# Altium PCB PCB1.PcbDoc
Units mm, origin at the board's own origin, x right, y up, seen from the top; angles counter-clockwise.
Board outline 46.86 x 54.61 mm, 2 copper layers (Top Layer, Bottom Layer); 14 components, 16 nets, 104 pads, 8 vias.
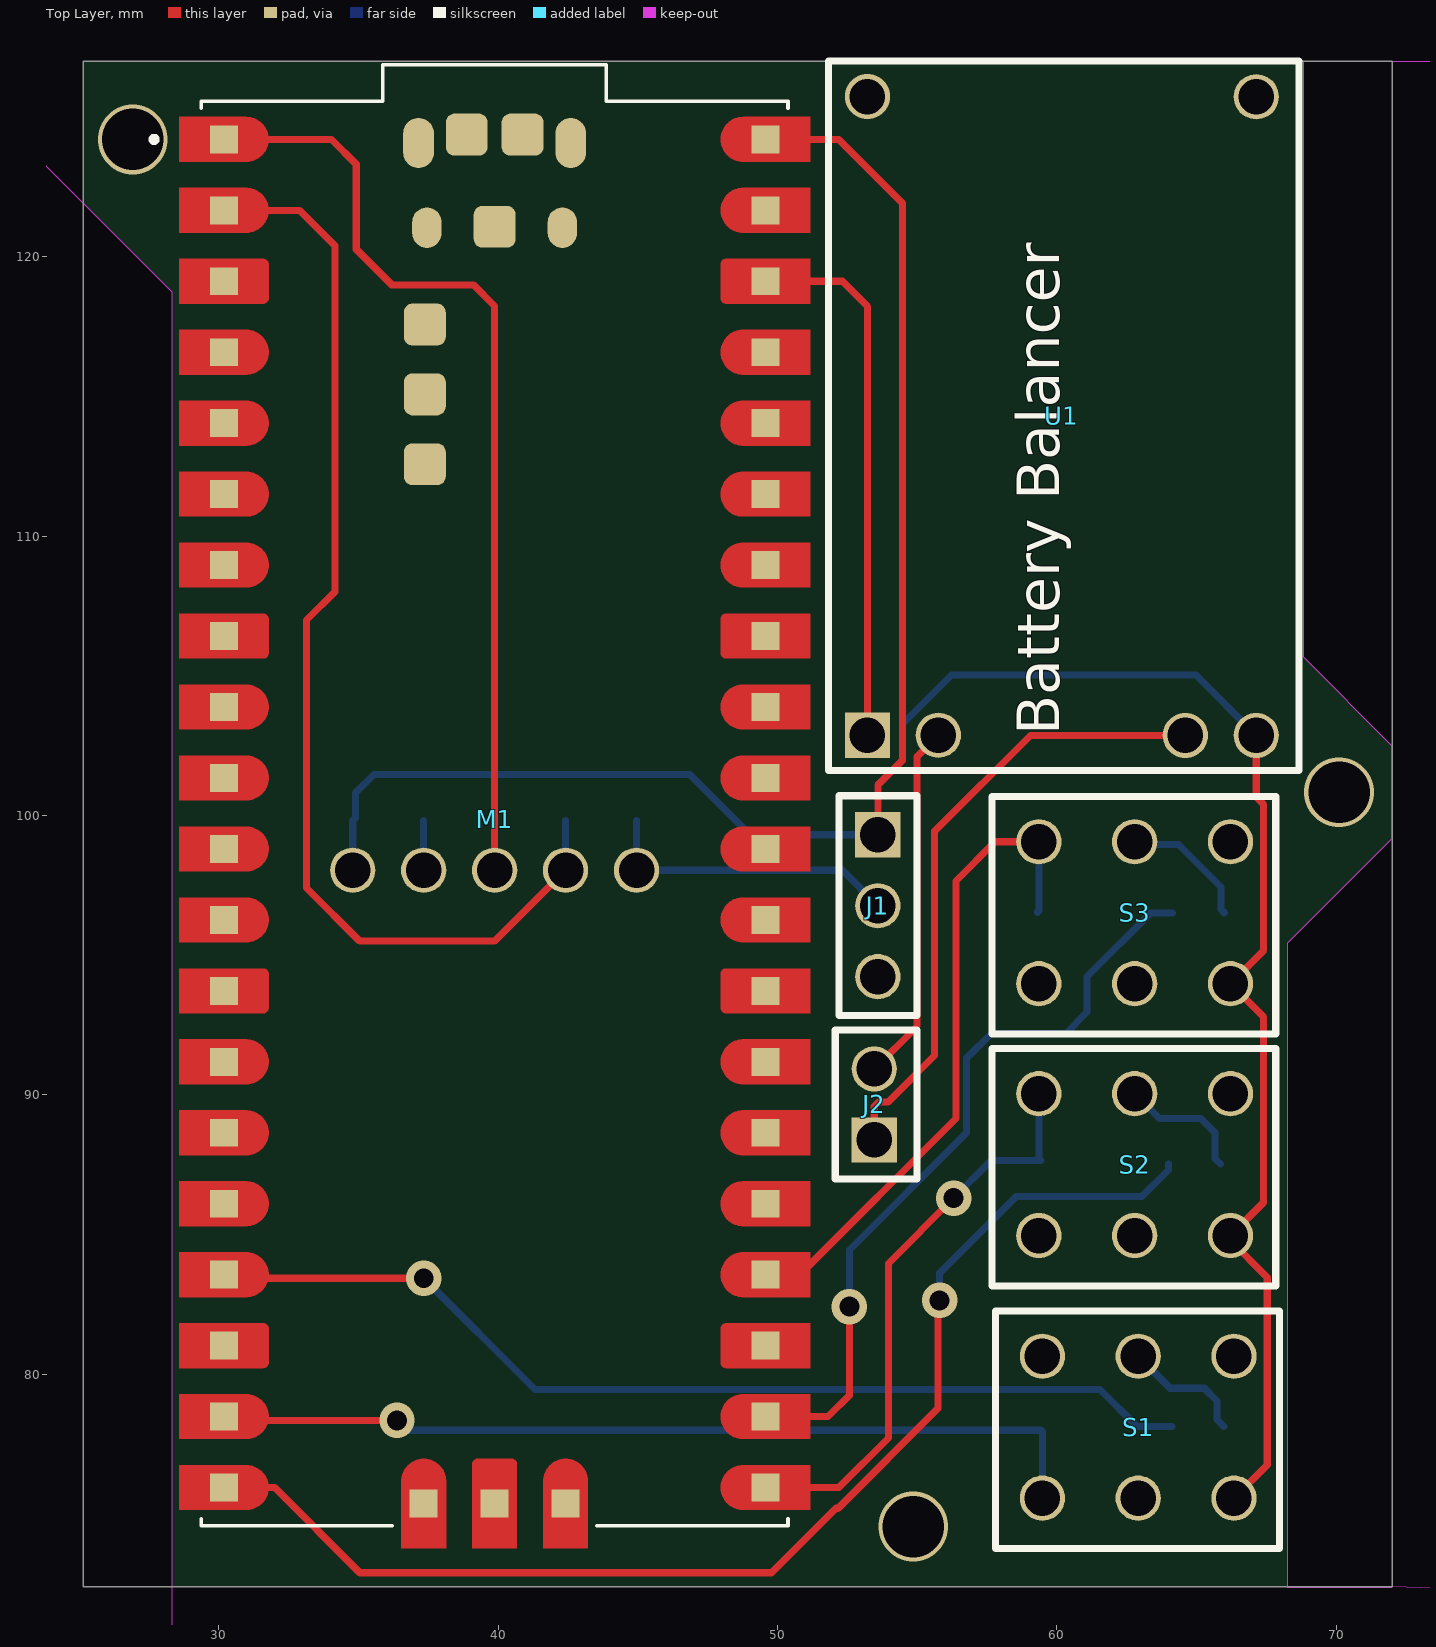
[diagram p0: Top Layer view]
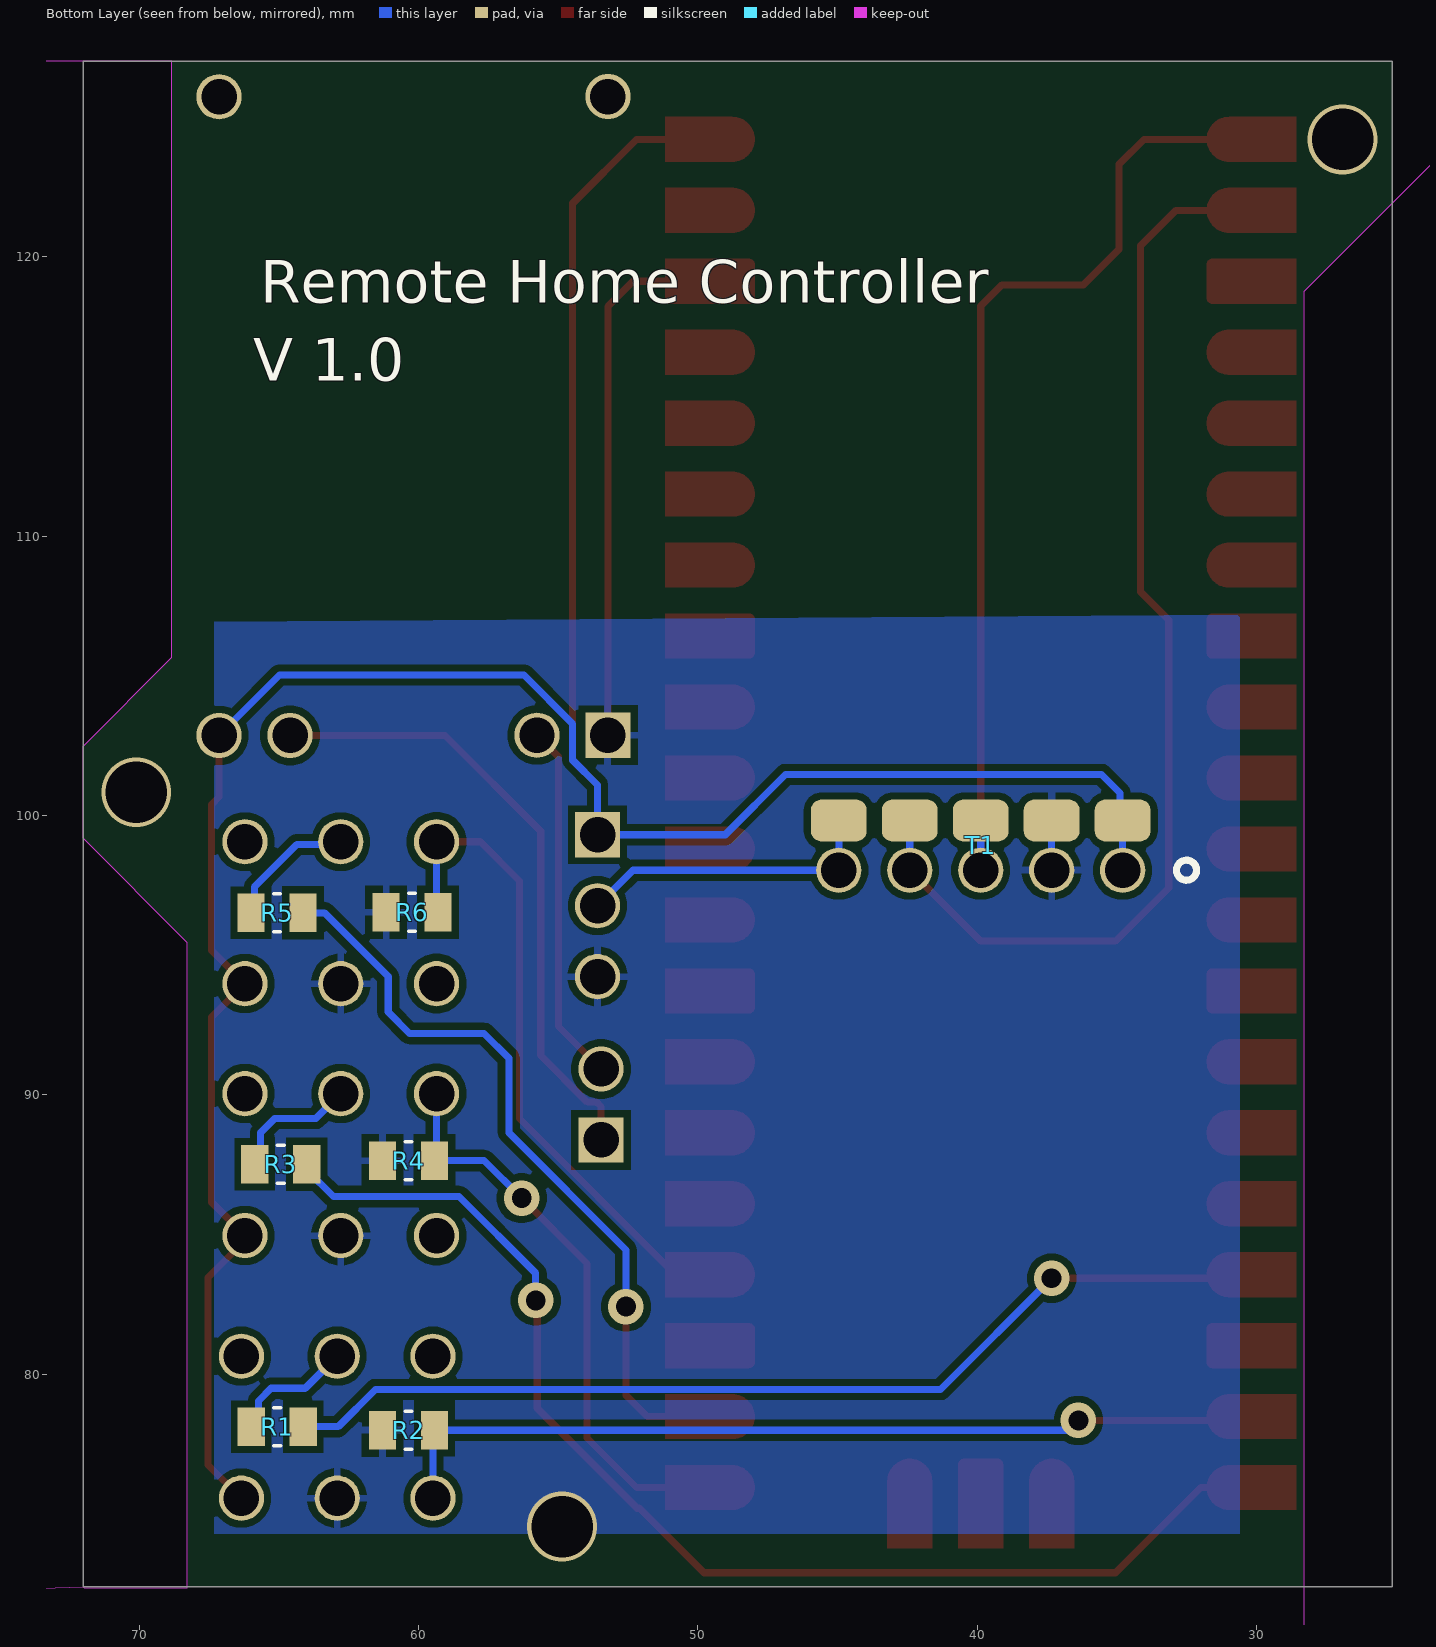
[diagram p1: Bottom Layer view, seen from below]
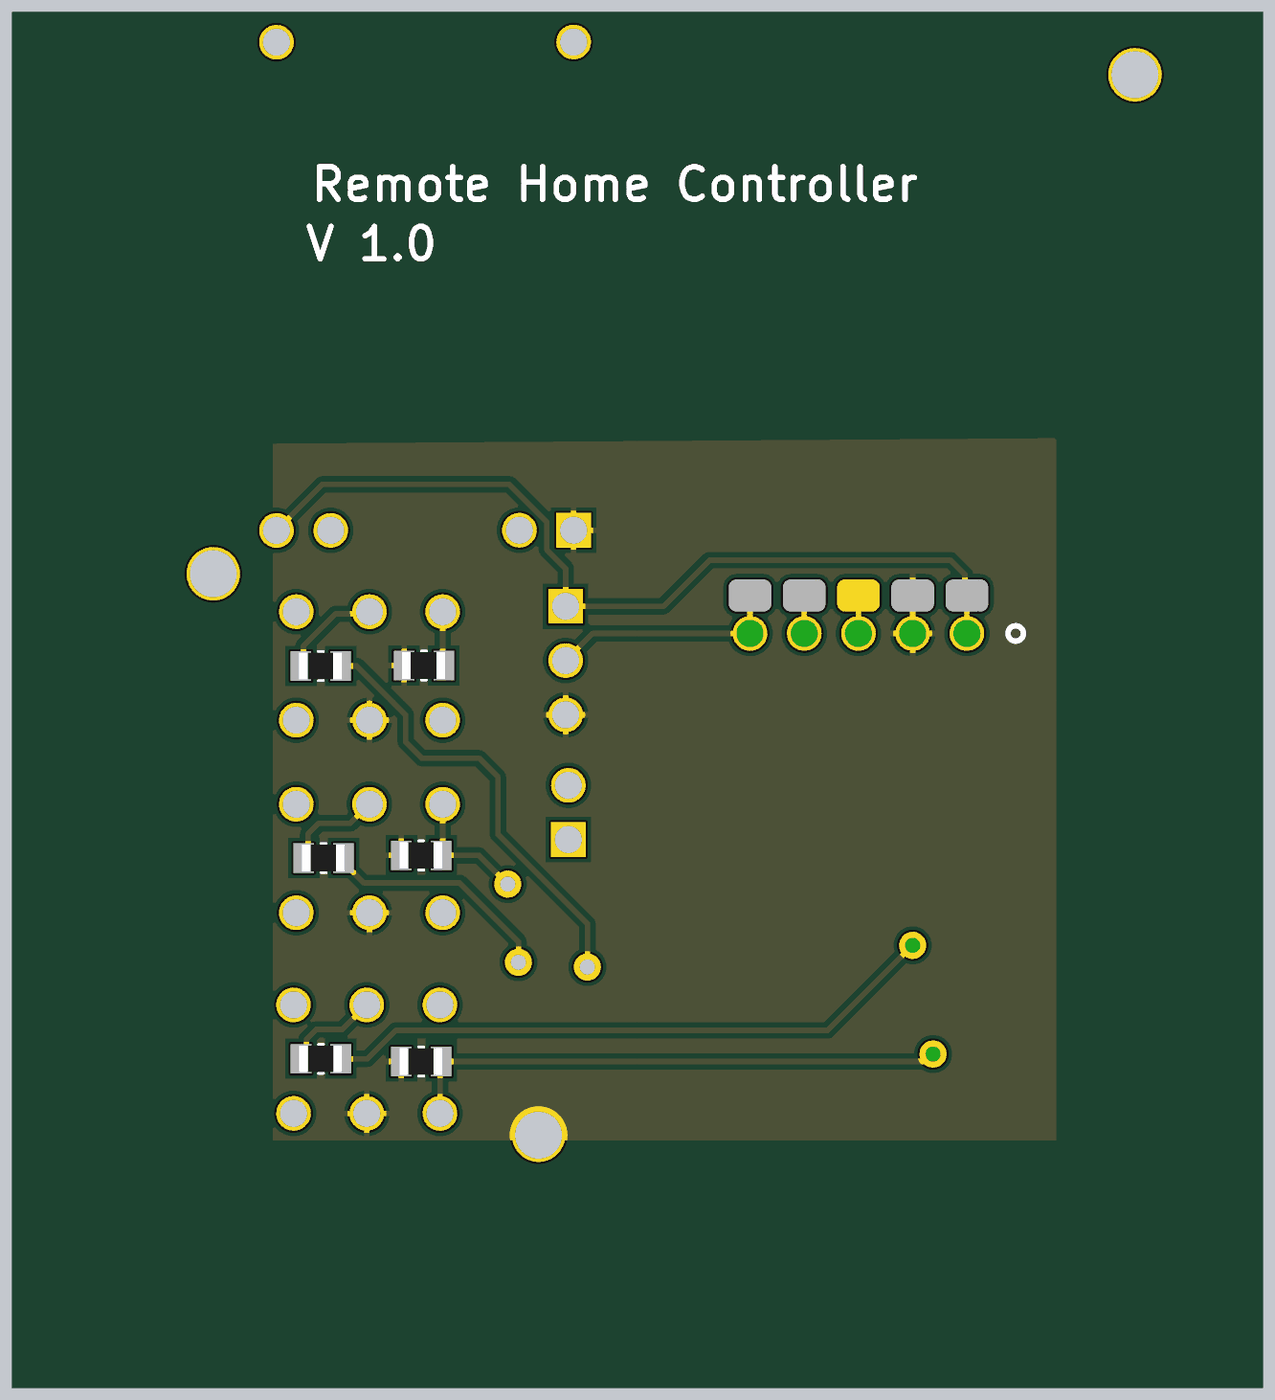
[diagram p2: 3D render of the assembled board from below, using the file's embedded part models]

## Layer stack, top to bottom
Top Solder: solder mask 0.0102, Solder Resist, Dk 3.5
Top Layer: signal copper 0.0356
Dielectric 1: dielectric 0.32, FR-4, Dk 4.8
Bottom Layer: signal copper 0.0356
Bottom Solder: solder mask 0.0102, Solder Resist, Dk 3.5

## Board outline
25.146,72.39 25.146,127 72.009,127 72.009,72.39
cut-out: 72.009,72.39 71.973,72.354 68.275,72.354 68.275,95.453 72.009,99.187 72.009,102.489 68.834,105.664 68.834,127 74.422,127 74.549,127.127 79.502,122.174 79.502,72.136
cut-out: 20.955,126.111 28.321,118.745 28.321,70.104 20.955,62.738

## Design rules (kind name [scope] priority, off if disabled: settings)
Clearance [All] p1: gap=0.254 ignorepadtopadclearanceinfootprint=FALSE
PolygonConnect [All] p1: connectstyle=Relief reliefconductorwidth=0.254 reliefentries=4 polygonreliefangle="90 Angle" airgapwidth=0.254
RoutingVias [All] p1: holewidth=0.711 width=1.27 viastyle="Through Hole" minholewidth=0.711 minwidth=1.27 maxholewidth=0.711 maxwidth=1.27
SolderMaskExpansion [All] p1: expansion=0.102 istentingtop=FALSE
Width [All] p1: maxlimit=0.254 minlimit=0.254 preferedwidth=0.254
30 further rules are at their usual default settings.

## Components (designator, comment, footprint, x,y, rotation, side; value= is the part's Value field where it differs from the comment)
J1 "3 Pin Header" "3 Pin Header-Footprint-1" 53.594,96.774 r270 top
J2 "2 Pin Header" "2 Pin Header-Footprint-1" 53.467,88.392 r90 top
M1 "Pi Pico" "Pi Pico-Footprint-1" 41.529,99.822 r0 top
R1 "SMD Resistor" "SMD Resistor-Footprint-1" 65.024,78.105 r0 bottom
R2 "SMD Resistor" "SMD Resistor-Footprint-1" 60.325,77.978 r0 bottom
R3 "SMD Resistor" "SMD Resistor-Footprint-1" 64.897,87.503 r0 bottom
R4 "SMD Resistor" "SMD Resistor-Footprint-1" 60.325,87.63 r0 bottom
R5 "SMD Resistor" "SMD Resistor-Footprint-1" 65.03,96.499 r0 bottom
R6 "SMD Resistor" "SMD Resistor-Footprint-1" 60.198,96.52 r0 bottom
S1 "Button Switch DIP" "Button Switch DIP -Footprint-1" 62.992,78.105 r270 top
S2 "Button Switch DIP" "Button Switch DIP -Footprint-1" 62.865,87.503 r270 top
S3 "Button Switch DIP" "Button Switch DIP -Footprint-1" 62.865,96.52 r270 top
T1 "HC-12" HC-12-Footprint-1 39.878,98.044 r0 bottom
U1 "Battery Balancer" "Battery Balancer-Footprint-1" 59.394,103.378 r0 top

## Footprints (in the part's own frame and the unit in brackets; to place one, negate y for a bottom-side part, rotate by r counter-clockwise, add the part's x,y. Pads: shape width x height; smd on the part's side, far side on the other; paste and mask are expansions set on the pad)
"2 Pin Header-Footprint-1" [mm]
  rect 1.62x1.62 hole 1.27: 1(0,0)
  round 1.62 hole 1.27: 2(2.54,0)
  silkscreen extent -1.4,-1.52 3.94,1.4
"3 Pin Header-Footprint-1" [mm]
  rect 1.62x1.62 hole 1.27: 1(-2.54,0)
  round 1.62 hole 1.27: 2(0,0) 3(2.54,0)
  silkscreen extent -3.94,-1.4 3.94,1.4
"Battery Balancer-Footprint-1" [mm]
  round 1.62 hole 1.27: "Bat +"(5.207,-0.508) "Bat -"(-3.633,-0.501) "GND In"(-6.173,22.359) Vin(7.747,22.352) Vout+(7.747,-0.508)
  rect 1.62x1.62 hole 1.27: "Vout -"(-6.173,-0.501)
  silkscreen extent -7.57,-1.77 9.27,23.63, body extent -7.59,-1.77 9.27,23.63, height 4
"Button Switch DIP -Footprint-1" [mm]
  round 1.62 hole 1.27: 1(-2.543,3.35) 2(2.537,3.35) 3(-2.543,-3.508) 4(2.537,-3.508) A(-2.543,-0.079) K(2.537,-0.079)
  silkscreen extent -4.16,-5.19 4.35,4.97, body extent -3.78,-4.81 3.96,4.59, height 6
HC-12-Footprint-1 [mm]
  round 1.62 hole 1.27: GND(-2.54,0) RXD(0,0) SET(5.08,0) TXD(2.54,0) VCC(-5.08,0)
  rrect50% 2x1.5 smd: GND_(-2.54,-1.778) SET_(5.08,-1.778) TXD_(2.54,-1.778) VCC_(-5.08,-1.778)
  rrect50% 2x1.5 smd paste-1: RXD_(0,-1.778)
  silkscreen extent -7.72,-0.36 -7.01,0.36, body extent -6.54,-2.79 6.79,24.51, height 5
"Pi Pico-Footprint-1" [mm]
  rect 1x1 smd paste-1 mask+0: 1(-11.341,24.384) 2(-11.341,21.844) 3(-11.341,19.304) 4(-11.341,16.764) 5(-11.341,14.224) 6(-11.341,11.684) 7(-11.341,9.144) 8(-11.341,6.604) 9(-11.341,4.064) 10(-11.341,1.524) 11(-11.341,-1.016) 12(-11.341,-3.556) 13(-11.341,-6.096) 14(-11.341,-8.636) 15(-11.341,-11.176) 16(-11.341,-13.716) 17(-11.341,-16.256) 18(-11.341,-18.796) 19(-11.341,-21.336) 20(-11.341,-23.876) 21(8.039,-23.876) 22(8.039,-21.336) 23(8.039,-18.796) 24(8.039,-16.256) 25(8.039,-13.716) 26(8.039,-11.176) 27(8.039,-8.636) 28(8.039,-6.096) 29(8.039,-3.556) 30(8.039,-1.016) 31(8.039,1.524) 32(8.039,4.064) 33(8.039,6.604) 34(8.039,9.144) 35(8.039,11.684) 36(8.039,14.224) 37(8.039,16.764) 38(8.039,19.304) 39(8.039,21.844) 40(8.039,24.384) D1(-4.191,-24.446) D2(-1.651,-24.446) D3(0.889,-24.446)
  oval 1.1x1.8 smd: A(-4.376,24.254) B(1.074,24.254)
  oval 1.05x1.45 smd: C(-4.076,21.224) D(0.774,21.224)
  rrect40% 1.5x1.5 smd: TP1(-1.651,21.254) TP2(-0.651,24.554) TP3(-2.651,24.554) TP4(-4.151,17.754) TP5(-4.151,15.254) TP6(-4.151,12.754)
  Top Layer region: -10.499,4.863 -10.457,4.86 -10.416,4.854 -10.375,4.847 -10.334,4.837 -10.294,4.825 -10.254,4.811 -10.216,4.795 -10.178,4.777 -10.141,4.757 -10.105,4.735 -10.071,4.711 -10.038,4.686 -10.006,4.659 -9.975,4.63 -9.946,4.599 -9.919,4.567 -9.894,4.534 -9.87,4.5 -9.848,4.464 -9.828,4.427 -9.81,4.389 -9.794,4.351 -9.78,4.311 -9.768,4.271 -9.758,4.23 -9.751,4.189 -9.745,4.148 -9.742,4.106 -9.741,4.064 -9.742,4.022 -9.745,3.98 -9.751,3.939 -9.758,3.898 -9.768,3.857 -9.78,3.817 -9.794,3.777 -9.81,3.739 -9.828,3.701 -9.848,3.664 -9.87,3.628 -9.894,3.594 -9.919,3.561 -9.946,3.529 -9.975,3.498 -10.006,3.469 -10.038,3.442 -10.071,3.417 -10.105,3.393 -10.141,3.371 -10.178,3.351 -10.216,3.333 -10.254,3.317 -10.294,3.303 -10.334,3.291 -10.375,3.281 -10.416,3.274 -10.457,3.268 -10.499,3.265 -10.541,3.264 -12.941,3.264 -12.941,4.864 -10.541,4.864
  Top Layer region: -10.499,2.323 -10.457,2.32 -10.416,2.314 -10.375,2.307 -10.334,2.297 -10.294,2.285 -10.254,2.271 -10.216,2.255 -10.178,2.237 -10.141,2.217 -10.105,2.195 -10.071,2.171 -10.038,2.146 -10.006,2.119 -9.975,2.09 -9.946,2.059 -9.919,2.027 -9.894,1.994 -9.87,1.96 -9.848,1.924 -9.828,1.887 -9.81,1.849 -9.794,1.811 -9.78,1.771 -9.768,1.731 -9.758,1.69 -9.751,1.649 -9.745,1.608 -9.742,1.566 -9.741,1.524 -9.742,1.482 -9.745,1.44 -9.751,1.399 -9.758,1.358 -9.768,1.317 -9.78,1.277 -9.794,1.237 -9.81,1.199 -9.828,1.161 -9.848,1.124 -9.87,1.088 -9.894,1.054 -9.919,1.021 -9.946,0.989 -9.975,0.958 -10.006,0.929 -10.038,0.902 -10.071,0.877 -10.105,0.853 -10.141,0.831 -10.178,0.811 -10.216,0.793 -10.254,0.777 -10.294,0.763 -10.334,0.751 -10.375,0.741 -10.416,0.734 -10.457,0.728 -10.499,0.725 -10.541,0.724 -12.941,0.724 -12.941,2.324 -10.541,2.324
  Top Layer region: -10.499,-0.217 -10.457,-0.22 -10.416,-0.226 -10.375,-0.233 -10.334,-0.243 -10.294,-0.255 -10.254,-0.269 -10.216,-0.285 -10.178,-0.303 -10.141,-0.323 -10.105,-0.345 -10.071,-0.369 -10.038,-0.394 -10.006,-0.421 -9.975,-0.45 -9.946,-0.481 -9.919,-0.513 -9.894,-0.546 -9.87,-0.58 -9.848,-0.616 -9.828,-0.653 -9.81,-0.691 -9.794,-0.729 -9.78,-0.769 -9.768,-0.809 -9.758,-0.85 -9.751,-0.891 -9.745,-0.932 -9.742,-0.974 -9.741,-1.016 -9.742,-1.058 -9.745,-1.1 -9.751,-1.141 -9.758,-1.182 -9.768,-1.223 -9.78,-1.263 -9.794,-1.303 -9.81,-1.341 -9.828,-1.379 -9.848,-1.416 -9.87,-1.452 -9.894,-1.486 -9.919,-1.519 -9.946,-1.551 -9.975,-1.582 -10.006,-1.611 -10.038,-1.638 -10.071,-1.663 -10.105,-1.687 -10.141,-1.709 -10.178,-1.729 -10.216,-1.747 -10.254,-1.763 -10.294,-1.777 -10.334,-1.789 -10.375,-1.799 -10.416,-1.806 -10.457,-1.812 -10.499,-1.815 -10.541,-1.816 -12.941,-1.816 -12.941,-0.216 -10.541,-0.216
  Top Layer region: -10.499,-2.757 -10.457,-2.76 -10.416,-2.766 -10.375,-2.773 -10.334,-2.783 -10.294,-2.795 -10.254,-2.809 -10.216,-2.825 -10.178,-2.843 -10.141,-2.863 -10.105,-2.885 -10.071,-2.909 -10.038,-2.934 -10.006,-2.961 -9.975,-2.99 -9.946,-3.021 -9.919,-3.053 -9.894,-3.086 -9.87,-3.12 -9.848,-3.156 -9.828,-3.193 -9.81,-3.231 -9.794,-3.269 -9.78,-3.309 -9.768,-3.349 -9.758,-3.39 -9.751,-3.431 -9.745,-3.472 -9.742,-3.514 -9.741,-3.556 -9.742,-3.598 -9.745,-3.64 -9.751,-3.681 -9.758,-3.722 -9.768,-3.763 -9.78,-3.803 -9.794,-3.843 -9.81,-3.881 -9.828,-3.919 -9.848,-3.956 -9.87,-3.992 -9.894,-4.026 -9.919,-4.059 -9.946,-4.091 -9.975,-4.122 -10.006,-4.151 -10.038,-4.178 -10.071,-4.203 -10.105,-4.227 -10.141,-4.249 -10.178,-4.269 -10.216,-4.287 -10.254,-4.303 -10.294,-4.317 -10.334,-4.329 -10.375,-4.339 -10.416,-4.346 -10.457,-4.352 -10.499,-4.355 -10.541,-4.356 -12.941,-4.356 -12.941,-2.756 -10.541,-2.756
  Top Layer region: -10.499,-7.837 -10.457,-7.84 -10.416,-7.846 -10.375,-7.853 -10.334,-7.863 -10.294,-7.875 -10.254,-7.889 -10.216,-7.905 -10.178,-7.923 -10.141,-7.943 -10.105,-7.965 -10.071,-7.989 -10.038,-8.014 -10.006,-8.041 -9.975,-8.07 -9.946,-8.101 -9.919,-8.133 -9.894,-8.166 -9.87,-8.2 -9.848,-8.236 -9.828,-8.273 -9.81,-8.311 -9.794,-8.349 -9.78,-8.389 -9.768,-8.429 -9.758,-8.47 -9.751,-8.511 -9.745,-8.552 -9.742,-8.594 -9.741,-8.636 -9.742,-8.678 -9.745,-8.72 -9.751,-8.761 -9.758,-8.802 -9.768,-8.843 -9.78,-8.883 -9.794,-8.923 -9.81,-8.961 -9.828,-8.999 -9.848,-9.036 -9.87,-9.072 -9.894,-9.106 -9.919,-9.139 -9.946,-9.171 -9.975,-9.202 -10.006,-9.231 -10.038,-9.258 -10.071,-9.283 -10.105,-9.307 -10.141,-9.329 -10.178,-9.349 -10.216,-9.367 -10.254,-9.383 -10.294,-9.397 -10.334,-9.409 -10.375,-9.419 -10.416,-9.426 -10.457,-9.432 -10.499,-9.435 -10.541,-9.436 -12.941,-9.436 -12.941,-7.836 -10.541,-7.836
  Top Layer region: -10.499,-10.377 -10.457,-10.38 -10.416,-10.386 -10.375,-10.393 -10.334,-10.403 -10.294,-10.415 -10.254,-10.429 -10.216,-10.445 -10.178,-10.463 -10.141,-10.483 -10.105,-10.505 -10.071,-10.529 -10.038,-10.554 -10.006,-10.581 -9.975,-10.61 -9.946,-10.641 -9.919,-10.673 -9.894,-10.706 -9.87,-10.74 -9.848,-10.776 -9.828,-10.813 -9.81,-10.851 -9.794,-10.889 -9.78,-10.929 -9.768,-10.969 -9.758,-11.01 -9.751,-11.051 -9.745,-11.092 -9.742,-11.134 -9.741,-11.176 -9.742,-11.218 -9.745,-11.26 -9.751,-11.301 -9.758,-11.342 -9.768,-11.383 -9.78,-11.423 -9.794,-11.463 -9.81,-11.501 -9.828,-11.539 -9.848,-11.576 -9.87,-11.612 -9.894,-11.646 -9.919,-11.679 -9.946,-11.711 -9.975,-11.742 -10.006,-11.771 -10.038,-11.798 -10.071,-11.823 -10.105,-11.847 -10.141,-11.869 -10.178,-11.889 -10.216,-11.907 -10.254,-11.923 -10.294,-11.937 -10.334,-11.949 -10.375,-11.959 -10.416,-11.966 -10.457,-11.972 -10.499,-11.975 -10.541,-11.976 -12.941,-11.976 -12.941,-10.376 -10.541,-10.376
  Top Layer region: -10.499,-12.917 -10.457,-12.92 -10.416,-12.926 -10.375,-12.933 -10.334,-12.943 -10.294,-12.955 -10.254,-12.969 -10.216,-12.985 -10.178,-13.003 -10.141,-13.023 -10.105,-13.045 -10.071,-13.069 -10.038,-13.094 -10.006,-13.121 -9.975,-13.15 -9.946,-13.181 -9.919,-13.213 -9.894,-13.246 -9.87,-13.28 -9.848,-13.316 -9.828,-13.353 -9.81,-13.391 -9.794,-13.429 -9.78,-13.469 -9.768,-13.509 -9.758,-13.55 -9.751,-13.591 -9.745,-13.632 -9.742,-13.674 -9.741,-13.716 -9.742,-13.758 -9.745,-13.8 -9.751,-13.841 -9.758,-13.882 -9.768,-13.923 -9.78,-13.963 -9.794,-14.003 -9.81,-14.041 -9.828,-14.079 -9.848,-14.116 -9.87,-14.152 -9.894,-14.186 -9.919,-14.219 -9.946,-14.251 -9.975,-14.282 -10.006,-14.311 -10.038,-14.338 -10.071,-14.363 -10.105,-14.387 -10.141,-14.409 -10.178,-14.429 -10.216,-14.447 -10.254,-14.463 -10.294,-14.477 -10.334,-14.489 -10.375,-14.499 -10.416,-14.506 -10.457,-14.512 -10.499,-14.515 -10.541,-14.516 -12.941,-14.516 -12.941,-12.916 -10.541,-12.916
  Top Layer region: -10.499,-15.457 -10.457,-15.46 -10.416,-15.466 -10.375,-15.473 -10.334,-15.483 -10.294,-15.495 -10.254,-15.509 -10.216,-15.525 -10.178,-15.543 -10.141,-15.563 -10.105,-15.585 -10.071,-15.609 -10.038,-15.634 -10.006,-15.661 -9.975,-15.69 -9.946,-15.721 -9.919,-15.753 -9.894,-15.786 -9.87,-15.82 -9.848,-15.856 -9.828,-15.893 -9.81,-15.931 -9.794,-15.969 -9.78,-16.009 -9.768,-16.049 -9.758,-16.09 -9.751,-16.131 -9.745,-16.172 -9.742,-16.214 -9.741,-16.256 -9.742,-16.298 -9.745,-16.34 -9.751,-16.381 -9.758,-16.422 -9.768,-16.463 -9.78,-16.503 -9.794,-16.543 -9.81,-16.581 -9.828,-16.619 -9.848,-16.656 -9.87,-16.692 -9.894,-16.726 -9.919,-16.759 -9.946,-16.791 -9.975,-16.822 -10.006,-16.851 -10.038,-16.878 -10.071,-16.903 -10.105,-16.927 -10.141,-16.949 -10.178,-16.969 -10.216,-16.987 -10.254,-17.003 -10.294,-17.017 -10.334,-17.029 -10.375,-17.039 -10.416,-17.046 -10.457,-17.052 -10.499,-17.055 -10.541,-17.056 -12.941,-17.056 -12.941,-15.456 -10.541,-15.456
  Top Layer region: -10.499,-20.537 -10.457,-20.54 -10.416,-20.546 -10.375,-20.553 -10.334,-20.563 -10.294,-20.575 -10.254,-20.589 -10.216,-20.605 -10.178,-20.623 -10.141,-20.643 -10.105,-20.665 -10.071,-20.689 -10.038,-20.714 -10.006,-20.741 -9.975,-20.77 -9.946,-20.801 -9.919,-20.833 -9.894,-20.866 -9.87,-20.9 -9.848,-20.936 -9.828,-20.973 -9.81,-21.011 -9.794,-21.049 -9.78,-21.089 -9.768,-21.129 -9.758,-21.17 -9.751,-21.211 -9.745,-21.252 -9.742,-21.294 -9.741,-21.336 -9.742,-21.378 -9.745,-21.42 -9.751,-21.461 -9.758,-21.502 -9.768,-21.543 -9.78,-21.583 -9.794,-21.623 -9.81,-21.661 -9.828,-21.699 -9.848,-21.736 -9.87,-21.772 -9.894,-21.806 -9.919,-21.839 -9.946,-21.871 -9.975,-21.902 -10.006,-21.931 -10.038,-21.958 -10.071,-21.983 -10.105,-22.007 -10.141,-22.029 -10.178,-22.049 -10.216,-22.067 -10.254,-22.083 -10.294,-22.097 -10.334,-22.109 -10.375,-22.119 -10.416,-22.126 -10.457,-22.132 -10.499,-22.135 -10.541,-22.136 -12.941,-22.136 -12.941,-20.536 -10.541,-20.536
  Top Layer region: -10.499,-23.077 -10.457,-23.08 -10.416,-23.086 -10.375,-23.093 -10.334,-23.103 -10.294,-23.115 -10.254,-23.129 -10.216,-23.145 -10.178,-23.163 -10.141,-23.183 -10.105,-23.205 -10.071,-23.229 -10.038,-23.254 -10.006,-23.281 -9.975,-23.31 -9.946,-23.341 -9.919,-23.373 -9.894,-23.406 -9.87,-23.44 -9.848,-23.476 -9.828,-23.513 -9.81,-23.551 -9.794,-23.589 -9.78,-23.629 -9.768,-23.669 -9.758,-23.71 -9.751,-23.751 -9.745,-23.792 -9.742,-23.834 -9.741,-23.876 -9.742,-23.918 -9.745,-23.96 -9.751,-24.001 -9.758,-24.042 -9.768,-24.083 -9.78,-24.123 -9.794,-24.163 -9.81,-24.201 -9.828,-24.239 -9.848,-24.276 -9.87,-24.312 -9.894,-24.346 -9.919,-24.379 -9.946,-24.411 -9.975,-24.442 -10.006,-24.471 -10.038,-24.498 -10.071,-24.523 -10.105,-24.547 -10.141,-24.569 -10.178,-24.589 -10.216,-24.607 -10.254,-24.623 -10.294,-24.637 -10.334,-24.649 -10.375,-24.659 -10.416,-24.666 -10.457,-24.672 -10.499,-24.675 -10.541,-24.676 -12.941,-24.676 -12.941,-23.076 -10.541,-23.076
  Top Layer region: -9.92,20.103 -9.91,20.102 -9.899,20.1 -9.889,20.097 -9.879,20.094 -9.869,20.091 -9.86,20.087 -9.85,20.082 -9.841,20.077 -9.832,20.072 -9.823,20.066 -9.815,20.059 -9.807,20.053 -9.8,20.045 -9.792,20.038 -9.786,20.03 -9.779,20.022 -9.773,20.013 -9.768,20.004 -9.763,19.995 -9.758,19.985 -9.754,19.976 -9.751,19.966 -9.748,19.956 -9.745,19.946 -9.743,19.935 -9.742,19.925 -9.741,19.914 -9.741,19.904 -9.741,18.704 -9.741,18.694 -9.742,18.683 -9.743,18.673 -9.745,18.662 -9.748,18.652 -9.751,18.642 -9.754,18.632 -9.758,18.623 -9.763,18.613 -9.768,18.604 -9.773,18.595 -9.779,18.586 -9.786,18.578 -9.792,18.57 -9.8,18.563 -9.807,18.555 -9.815,18.549 -9.823,18.542 -9.832,18.536 -9.841,18.531 -9.85,18.526 -9.86,18.521 -9.869,18.517 -9.879,18.514 -9.889,18.511 -9.899,18.508 -9.91,18.506 -9.92,18.505 -9.931,18.504 -12.941,18.504 -12.941,20.104 -9.931,20.104
  Top Layer region: -9.92,7.403 -9.91,7.402 -9.899,7.4 -9.889,7.397 -9.879,7.394 -9.869,7.391 -9.86,7.387 -9.85,7.382 -9.841,7.377 -9.832,7.372 -9.823,7.366 -9.815,7.359 -9.807,7.353 -9.8,7.345 -9.792,7.338 -9.786,7.33 -9.779,7.322 -9.773,7.313 -9.768,7.304 -9.763,7.295 -9.758,7.285 -9.754,7.276 -9.751,7.266 -9.748,7.256 -9.745,7.246 -9.743,7.235 -9.742,7.225 -9.741,7.214 -9.741,7.204 -9.741,6.004 -9.741,5.994 -9.742,5.983 -9.743,5.973 -9.745,5.962 -9.748,5.952 -9.751,5.942 -9.754,5.932 -9.758,5.923 -9.763,5.913 -9.768,5.904 -9.773,5.895 -9.779,5.886 -9.786,5.878 -9.792,5.87 -9.8,5.863 -9.807,5.855 -9.815,5.849 -9.823,5.842 -9.832,5.836 -9.841,5.831 -9.85,5.826 -9.86,5.821 -9.869,5.817 -9.879,5.814 -9.889,5.811 -9.899,5.808 -9.91,5.806 -9.92,5.805 -9.931,5.804 -12.941,5.804 -12.941,7.404 -9.931,7.404
  Top Layer region: -9.92,-5.297 -9.91,-5.298 -9.899,-5.3 -9.889,-5.303 -9.879,-5.306 -9.869,-5.309 -9.86,-5.313 -9.85,-5.318 -9.841,-5.323 -9.832,-5.328 -9.823,-5.334 -9.815,-5.341 -9.807,-5.347 -9.8,-5.355 -9.792,-5.362 -9.786,-5.37 -9.779,-5.378 -9.773,-5.387 -9.768,-5.396 -9.763,-5.405 -9.758,-5.415 -9.754,-5.424 -9.751,-5.434 -9.748,-5.444 -9.745,-5.454 -9.743,-5.465 -9.742,-5.475 -9.741,-5.486 -9.741,-5.496 -9.741,-6.696 -9.741,-6.706 -9.742,-6.717 -9.743,-6.727 -9.745,-6.738 -9.748,-6.748 -9.751,-6.758 -9.754,-6.768 -9.758,-6.777 -9.763,-6.787 -9.768,-6.796 -9.773,-6.805 -9.779,-6.814 -9.786,-6.822 -9.792,-6.83 -9.8,-6.837 -9.807,-6.845 -9.815,-6.851 -9.823,-6.858 -9.832,-6.864 -9.841,-6.869 -9.85,-6.874 -9.86,-6.879 -9.869,-6.883 -9.879,-6.886 -9.889,-6.889 -9.899,-6.892 -9.91,-6.894 -9.92,-6.895 -9.931,-6.896 -12.941,-6.896 -12.941,-5.296 -9.931,-5.296
  Top Layer region: -9.92,-17.997 -9.91,-17.998 -9.899,-18 -9.889,-18.003 -9.879,-18.006 -9.869,-18.009 -9.86,-18.013 -9.85,-18.018 -9.841,-18.023 -9.832,-18.028 -9.823,-18.034 -9.815,-18.041 -9.807,-18.047 -9.8,-18.055 -9.792,-18.062 -9.786,-18.07 -9.779,-18.078 -9.773,-18.087 -9.768,-18.096 -9.763,-18.105 -9.758,-18.115 -9.754,-18.124 -9.751,-18.134 -9.748,-18.144 -9.745,-18.154 -9.743,-18.165 -9.742,-18.175 -9.741,-18.186 -9.741,-18.196 -9.741,-19.396 -9.741,-19.406 -9.742,-19.417 -9.743,-19.427 -9.745,-19.438 -9.748,-19.448 -9.751,-19.458 -9.754,-19.468 -9.758,-19.477 -9.763,-19.487 -9.768,-19.496 -9.773,-19.505 -9.779,-19.514 -9.786,-19.522 -9.792,-19.53 -9.8,-19.537 -9.807,-19.545 -9.815,-19.551 -9.823,-19.558 -9.832,-19.564 -9.841,-19.569 -9.85,-19.574 -9.86,-19.579 -9.869,-19.583 -9.879,-19.586 -9.889,-19.589 -9.899,-19.592 -9.91,-19.594 -9.92,-19.595 -9.931,-19.596 -12.941,-19.596 -12.941,-17.996 -9.931,-17.996
  Top Layer region: -10.499,22.643 -10.457,22.64 -10.416,22.634 -10.375,22.627 -10.334,22.617 -10.294,22.605 -10.254,22.591 -10.216,22.575 -10.178,22.557 -10.141,22.537 -10.105,22.515 -10.071,22.491 -10.038,22.466 -10.006,22.439 -9.975,22.41 -9.946,22.379 -9.919,22.347 -9.894,22.314 -9.87,22.28 -9.848,22.244 -9.828,22.207 -9.81,22.169 -9.794,22.131 -9.78,22.091 -9.768,22.051 -9.758,22.01 -9.751,21.969 -9.745,21.928 -9.742,21.886 -9.741,21.844 -9.742,21.802 -9.745,21.76 -9.751,21.719 -9.758,21.678 -9.768,21.637 -9.78,21.597 -9.794,21.557 -9.81,21.519 -9.828,21.481 -9.848,21.444 -9.87,21.408 -9.894,21.374 -9.919,21.341 -9.946,21.309 -9.975,21.278 -10.006,21.249 -10.038,21.222 -10.071,21.197 -10.105,21.173 -10.141,21.151 -10.178,21.131 -10.216,21.113 -10.254,21.097 -10.294,21.083 -10.334,21.071 -10.375,21.061 -10.416,21.054 -10.457,21.048 -10.499,21.045 -10.541,21.044 -12.941,21.044 -12.941,22.644 -10.541,22.644
  Top Layer region: -10.499,17.563 -10.457,17.56 -10.416,17.554 -10.375,17.547 -10.334,17.537 -10.294,17.525 -10.254,17.511 -10.216,17.495 -10.178,17.477 -10.141,17.457 -10.105,17.435 -10.071,17.411 -10.038,17.386 -10.006,17.359 -9.975,17.33 -9.946,17.299 -9.919,17.267 -9.894,17.234 -9.87,17.2 -9.848,17.164 -9.828,17.127 -9.81,17.089 -9.794,17.051 -9.78,17.011 -9.768,16.971 -9.758,16.93 -9.751,16.889 -9.745,16.848 -9.742,16.806 -9.741,16.764 -9.742,16.722 -9.745,16.68 -9.751,16.639 -9.758,16.598 -9.768,16.557 -9.78,16.517 -9.794,16.477 -9.81,16.439 -9.828,16.401 -9.848,16.364 -9.87,16.328 -9.894,16.294 -9.919,16.261 -9.946,16.229 -9.975,16.198 -10.006,16.169 -10.038,16.142 -10.071,16.117 -10.105,16.093 -10.141,16.071 -10.178,16.051 -10.216,16.033 -10.254,16.017 -10.294,16.003 -10.334,15.991 -10.375,15.981 -10.416,15.974 -10.457,15.968 -10.499,15.965 -10.541,15.964 -12.941,15.964 -12.941,17.564 -10.541,17.564
  Top Layer region: -10.499,15.023 -10.457,15.02 -10.416,15.014 -10.375,15.007 -10.334,14.997 -10.294,14.985 -10.254,14.971 -10.216,14.955 -10.178,14.937 -10.141,14.917 -10.105,14.895 -10.071,14.871 -10.038,14.846 -10.006,14.819 -9.975,14.79 -9.946,14.759 -9.919,14.727 -9.894,14.694 -9.87,14.66 -9.848,14.624 -9.828,14.587 -9.81,14.549 -9.794,14.511 -9.78,14.471 -9.768,14.431 -9.758,14.39 -9.751,14.349 -9.745,14.308 -9.742,14.266 -9.741,14.224 -9.742,14.182 -9.745,14.14 -9.751,14.099 -9.758,14.058 -9.768,14.017 -9.78,13.977 -9.794,13.937 -9.81,13.899 -9.828,13.861 -9.848,13.824 -9.87,13.788 -9.894,13.754 -9.919,13.721 -9.946,13.689 -9.975,13.658 -10.006,13.629 -10.038,13.602 -10.071,13.577 -10.105,13.553 -10.141,13.531 -10.178,13.511 -10.216,13.493 -10.254,13.477 -10.294,13.463 -10.334,13.451 -10.375,13.441 -10.416,13.434 -10.457,13.428 -10.499,13.425 -10.541,13.424 -12.941,13.424 -12.941,15.024 -10.541,15.024
  Top Layer region: -10.499,12.483 -10.457,12.48 -10.416,12.474 -10.375,12.467 -10.334,12.457 -10.294,12.445 -10.254,12.431 -10.216,12.415 -10.178,12.397 -10.141,12.377 -10.105,12.355 -10.071,12.331 -10.038,12.306 -10.006,12.279 -9.975,12.25 -9.946,12.219 -9.919,12.187 -9.894,12.154 -9.87,12.12 -9.848,12.084 -9.828,12.047 -9.81,12.009 -9.794,11.971 -9.78,11.931 -9.768,11.891 -9.758,11.85 -9.751,11.809 -9.745,11.768 -9.742,11.726 -9.741,11.684 -9.742,11.642 -9.745,11.6 -9.751,11.559 -9.758,11.518 -9.768,11.477 -9.78,11.437 -9.794,11.397 -9.81,11.359 -9.828,11.321 -9.848,11.284 -9.87,11.248 -9.894,11.214 -9.919,11.181 -9.946,11.149 -9.975,11.118 -10.006,11.089 -10.038,11.062 -10.071,11.037 -10.105,11.013 -10.141,10.991 -10.178,10.971 -10.216,10.953 -10.254,10.937 -10.294,10.923 -10.334,10.911 -10.375,10.901 -10.416,10.894 -10.457,10.888 -10.499,10.885 -10.541,10.884 -12.941,10.884 -12.941,12.484 -10.541,12.484
  Top Layer region: -10.499,9.943 -10.457,9.94 -10.416,9.934 -10.375,9.927 -10.334,9.917 -10.294,9.905 -10.254,9.891 -10.216,9.875 -10.178,9.857 -10.141,9.837 -10.105,9.815 -10.071,9.791 -10.038,9.766 -10.006,9.739 -9.975,9.71 -9.946,9.679 -9.919,9.647 -9.894,9.614 -9.87,9.58 -9.848,9.544 -9.828,9.507 -9.81,9.469 -9.794,9.431 -9.78,9.391 -9.768,9.351 -9.758,9.31 -9.751,9.269 -9.745,9.228 -9.742,9.186 -9.741,9.144 -9.742,9.102 -9.745,9.06 -9.751,9.019 -9.758,8.978 -9.768,8.937 -9.78,8.897 -9.794,8.857 -9.81,8.819 -9.828,8.781 -9.848,8.744 -9.87,8.708 -9.894,8.674 -9.919,8.641 -9.946,8.609 -9.975,8.578 -10.006,8.549 -10.038,8.522 -10.071,8.497 -10.105,8.473 -10.141,8.451 -10.178,8.431 -10.216,8.413 -10.254,8.397 -10.294,8.383 -10.334,8.371 -10.375,8.361 -10.416,8.354 -10.457,8.348 -10.499,8.345 -10.541,8.344 -12.941,8.344 -12.941,9.944 -10.541,9.944
  Top Layer region: 9.639,18.504 6.629,18.504 6.618,18.505 6.608,18.506 6.597,18.508 6.587,18.511 6.577,18.514 6.567,18.517 6.558,18.521 6.548,18.526 6.539,18.531 6.53,18.536 6.521,18.542 6.513,18.549 6.505,18.555 6.498,18.563 6.49,18.57 6.484,18.578 6.477,18.586 6.471,18.595 6.466,18.604 6.461,18.613 6.456,18.623 6.452,18.632 6.449,18.642 6.446,18.652 6.443,18.662 6.441,18.673 6.44,18.683 6.439,18.694 6.439,18.704 6.439,19.904 6.439,19.914 6.44,19.925 6.441,19.935 6.443,19.946 6.446,19.956 6.449,19.966 6.452,19.976 6.456,19.985 6.461,19.995 6.466,20.004 6.471,20.013 6.477,20.022 6.484,20.03 6.49,20.038 6.498,20.045 6.505,20.053 6.513,20.059 6.521,20.066 6.53,20.072 6.539,20.077 6.548,20.082 6.558,20.087 6.567,20.091 6.577,20.094 6.587,20.097 6.597,20.1 6.608,20.102 6.618,20.103 6.629,20.104 9.639,20.104
  Top Layer region: 9.639,21.044 7.239,21.044 7.197,21.045 7.155,21.048 7.114,21.054 7.073,21.061 7.032,21.071 6.992,21.083 6.952,21.097 6.914,21.113 6.876,21.131 6.839,21.151 6.803,21.173 6.769,21.197 6.736,21.222 6.704,21.249 6.673,21.278 6.644,21.309 6.617,21.341 6.592,21.374 6.568,21.408 6.546,21.444 6.526,21.481 6.508,21.519 6.492,21.557 6.478,21.597 6.466,21.637 6.456,21.678 6.449,21.719 6.443,21.76 6.44,21.802 6.439,21.844 6.44,21.886 6.443,21.928 6.449,21.969 6.456,22.01 6.466,22.051 6.478,22.091 6.492,22.131 6.508,22.169 6.526,22.207 6.546,22.244 6.568,22.28 6.592,22.314 6.617,22.347 6.644,22.379 6.673,22.41 6.704,22.439 6.736,22.466 6.769,22.491 6.803,22.515 6.839,22.537 6.876,22.557 6.914,22.575 6.952,22.591 6.992,22.605 7.032,22.617 7.073,22.627 7.114,22.634 7.155,22.64 7.197,22.643 7.239,22.644 9.639,22.644
  Top Layer region: 9.639,10.884 7.239,10.884 7.197,10.885 7.155,10.888 7.114,10.894 7.073,10.901 7.032,10.911 6.992,10.923 6.952,10.937 6.914,10.953 6.876,10.971 6.839,10.991 6.803,11.013 6.769,11.037 6.736,11.062 6.704,11.089 6.673,11.118 6.644,11.149 6.617,11.181 6.592,11.214 6.568,11.248 6.546,11.284 6.526,11.321 6.508,11.359 6.492,11.397 6.478,11.437 6.466,11.477 6.456,11.518 6.449,11.559 6.443,11.6 6.44,11.642 6.439,11.684 6.44,11.726 6.443,11.768 6.449,11.809 6.456,11.85 6.466,11.891 6.478,11.931 6.492,11.971 6.508,12.009 6.526,12.047 6.546,12.084 6.568,12.12 6.592,12.154 6.617,12.187 6.644,12.219 6.673,12.25 6.704,12.279 6.736,12.306 6.769,12.331 6.803,12.355 6.839,12.377 6.876,12.397 6.914,12.415 6.952,12.431 6.992,12.445 7.032,12.457 7.073,12.467 7.114,12.474 7.155,12.48 7.197,12.483 7.239,12.484 9.639,12.484
  Top Layer region: 9.639,-1.816 7.239,-1.816 7.197,-1.815 7.155,-1.812 7.114,-1.806 7.073,-1.799 7.032,-1.789 6.992,-1.777 6.952,-1.763 6.914,-1.747 6.876,-1.729 6.839,-1.709 6.803,-1.687 6.769,-1.663 6.736,-1.638 6.704,-1.611 6.673,-1.582 6.644,-1.551 6.617,-1.519 6.592,-1.486 6.568,-1.452 6.546,-1.416 6.526,-1.379 6.508,-1.341 6.492,-1.303 6.478,-1.263 6.466,-1.223 6.456,-1.182 6.449,-1.141 6.443,-1.1 6.44,-1.058 6.439,-1.016 6.44,-0.974 6.443,-0.932 6.449,-0.891 6.456,-0.85 6.466,-0.809 6.478,-0.769 6.492,-0.729 6.508,-0.691 6.526,-0.653 6.546,-0.616 6.568,-0.58 6.592,-0.546 6.617,-0.513 6.644,-0.481 6.673,-0.45 6.704,-0.421 6.736,-0.394 6.769,-0.369 6.803,-0.345 6.839,-0.323 6.876,-0.303 6.914,-0.285 6.952,-0.269 6.992,-0.255 7.032,-0.243 7.073,-0.233 7.114,-0.226 7.155,-0.22 7.197,-0.217 7.239,-0.216 9.639,-0.216
  Top Layer region: 9.639,-4.356 7.239,-4.356 7.197,-4.355 7.155,-4.352 7.114,-4.346 7.073,-4.339 7.032,-4.329 6.992,-4.317 6.952,-4.303 6.914,-4.287 6.876,-4.269 6.839,-4.249 6.803,-4.227 6.769,-4.203 6.736,-4.178 6.704,-4.151 6.673,-4.122 6.644,-4.091 6.617,-4.059 6.592,-4.026 6.568,-3.992 6.546,-3.956 6.526,-3.919 6.508,-3.881 6.492,-3.843 6.478,-3.803 6.466,-3.763 6.456,-3.722 6.449,-3.681 6.443,-3.64 6.44,-3.598 6.439,-3.556 6.44,-3.514 6.443,-3.472 6.449,-3.431 6.456,-3.39 6.466,-3.349 6.478,-3.309 6.492,-3.269 6.508,-3.231 6.526,-3.193 6.546,-3.156 6.568,-3.12 6.592,-3.086 6.617,-3.053 6.644,-3.021 6.673,-2.99 6.704,-2.961 6.736,-2.934 6.769,-2.909 6.803,-2.885 6.839,-2.863 6.876,-2.843 6.914,-2.825 6.952,-2.809 6.992,-2.795 7.032,-2.783 7.073,-2.773 7.114,-2.766 7.155,-2.76 7.197,-2.757 7.239,-2.756 9.639,-2.756
  Top Layer region: 9.639,-6.896 6.629,-6.896 6.618,-6.895 6.608,-6.894 6.597,-6.892 6.587,-6.889 6.577,-6.886 6.567,-6.883 6.558,-6.879 6.548,-6.874 6.539,-6.869 6.53,-6.864 6.521,-6.858 6.513,-6.851 6.505,-6.845 6.498,-6.837 6.49,-6.83 6.484,-6.822 6.477,-6.814 6.471,-6.805 6.466,-6.796 6.461,-6.787 6.456,-6.777 6.452,-6.768 6.449,-6.758 6.446,-6.748 6.443,-6.738 6.441,-6.727 6.44,-6.717 6.439,-6.706 6.439,-6.696 6.439,-5.496 6.439,-5.486 6.44,-5.475 6.441,-5.465 6.443,-5.454 6.446,-5.444 6.449,-5.434 6.452,-5.424 6.456,-5.415 6.461,-5.405 6.466,-5.396 6.471,-5.387 6.477,-5.378 6.484,-5.37 6.49,-5.362 6.498,-5.355 6.505,-5.347 6.513,-5.341 6.521,-5.334 6.53,-5.328 6.539,-5.323 6.548,-5.318 6.558,-5.313 6.567,-5.309 6.577,-5.306 6.587,-5.303 6.597,-5.3 6.608,-5.298 6.618,-5.297 6.629,-5.296 9.639,-5.296
  Top Layer region: 9.639,23.584 7.239,23.584 7.197,23.585 7.155,23.588 7.114,23.594 7.073,23.601 7.032,23.611 6.992,23.623 6.952,23.637 6.914,23.653 6.876,23.671 6.839,23.691 6.803,23.713 6.769,23.737 6.736,23.762 6.704,23.789 6.673,23.818 6.644,23.849 6.617,23.881 6.592,23.914 6.568,23.948 6.546,23.984 6.526,24.021 6.508,24.059 6.492,24.097 6.478,24.137 6.466,24.177 6.456,24.218 6.449,24.259 6.443,24.3 6.44,24.342 6.439,24.384 6.44,24.426 6.443,24.468 6.449,24.509 6.456,24.55 6.466,24.591 6.478,24.631 6.492,24.671 6.508,24.709 6.526,24.747 6.546,24.784 6.568,24.82 6.592,24.854 6.617,24.887 6.644,24.919 6.673,24.95 6.704,24.979 6.736,25.006 6.769,25.031 6.803,25.055 6.839,25.077 6.876,25.097 6.914,25.115 6.952,25.131 6.992,25.145 7.032,25.157 7.073,25.167 7.114,25.174 7.155,25.18 7.197,25.183 7.239,25.184 9.639,25.184
  Top Layer region: 9.639,15.964 7.239,15.964 7.197,15.965 7.155,15.968 7.114,15.974 7.073,15.981 7.032,15.991 6.992,16.003 6.952,16.017 6.914,16.033 6.876,16.051 6.839,16.071 6.803,16.093 6.769,16.117 6.736,16.142 6.704,16.169 6.673,16.198 6.644,16.229 6.617,16.261 6.592,16.294 6.568,16.328 6.546,16.364 6.526,16.401 6.508,16.439 6.492,16.477 6.478,16.517 6.466,16.557 6.456,16.598 6.449,16.639 6.443,16.68 6.44,16.722 6.439,16.764 6.44,16.806 6.443,16.848 6.449,16.889 6.456,16.93 6.466,16.971 6.478,17.011 6.492,17.051 6.508,17.089 6.526,17.127 6.546,17.164 6.568,17.2 6.592,17.234 6.617,17.267 6.644,17.299 6.673,17.33 6.704,17.359 6.736,17.386 6.769,17.411 6.803,17.435 6.839,17.457 6.876,17.477 6.914,17.495 6.952,17.511 6.992,17.525 7.032,17.537 7.073,17.547 7.114,17.554 7.155,17.56 7.197,17.563 7.239,17.564 9.639,17.564
  Top Layer region: 9.639,13.424 7.239,13.424 7.197,13.425 7.155,13.428 7.114,13.434 7.073,13.441 7.032,13.451 6.992,13.463 6.952,13.477 6.914,13.493 6.876,13.511 6.839,13.531 6.803,13.553 6.769,13.577 6.736,13.602 6.704,13.629 6.673,13.658 6.644,13.689 6.617,13.721 6.592,13.754 6.568,13.788 6.546,13.824 6.526,13.861 6.508,13.899 6.492,13.937 6.478,13.977 6.466,14.017 6.456,14.058 6.449,14.099 6.443,14.14 6.44,14.182 6.439,14.224 6.44,14.266 6.443,14.308 6.449,14.349 6.456,14.39 6.466,14.431 6.478,14.471 6.492,14.511 6.508,14.549 6.526,14.587 6.546,14.624 6.568,14.66 6.592,14.694 6.617,14.727 6.644,14.759 6.673,14.79 6.704,14.819 6.736,14.846 6.769,14.871 6.803,14.895 6.839,14.917 6.876,14.937 6.914,14.955 6.952,14.971 6.992,14.985 7.032,14.997 7.073,15.007 7.114,15.014 7.155,15.02 7.197,15.023 7.239,15.024 9.639,15.024
  Top Layer region: 9.639,8.344 7.239,8.344 7.197,8.345 7.155,8.348 7.114,8.354 7.073,8.361 7.032,8.371 6.992,8.383 6.952,8.397 6.914,8.413 6.876,8.431 6.839,8.451 6.803,8.473 6.769,8.497 6.736,8.522 6.704,8.549 6.673,8.578 6.644,8.609 6.617,8.641 6.592,8.674 6.568,8.708 6.546,8.744 6.526,8.781 6.508,8.819 6.492,8.857 6.478,8.897 6.466,8.937 6.456,8.978 6.449,9.019 6.443,9.06 6.44,9.102 6.439,9.144 6.44,9.186 6.443,9.228 6.449,9.269 6.456,9.31 6.466,9.351 6.478,9.391 6.492,9.431 6.508,9.469 6.526,9.507 6.546,9.544 6.568,9.58 6.592,9.614 6.617,9.647 6.644,9.679 6.673,9.71 6.704,9.739 6.736,9.766 6.769,9.791 6.803,9.815 6.839,9.837 6.876,9.857 6.914,9.875 6.952,9.891 6.992,9.905 7.032,9.917 7.073,9.927 7.114,9.934 7.155,9.94 7.197,9.943 7.239,9.944 9.639,9.944
  Top Layer region: 9.639,3.264 7.239,3.264 7.197,3.265 7.155,3.268 7.114,3.274 7.073,3.281 7.032,3.291 6.992,3.303 6.952,3.317 6.914,3.333 6.876,3.351 6.839,3.371 6.803,3.393 6.769,3.417 6.736,3.442 6.704,3.469 6.673,3.498 6.644,3.529 6.617,3.561 6.592,3.594 6.568,3.628 6.546,3.664 6.526,3.701 6.508,3.739 6.492,3.777 6.478,3.817 6.466,3.857 6.456,3.898 6.449,3.939 6.443,3.98 6.44,4.022 6.439,4.064 6.44,4.106 6.443,4.148 6.449,4.189 6.456,4.23 6.466,4.271 6.478,4.311 6.492,4.351 6.508,4.389 6.526,4.427 6.546,4.464 6.568,4.5 6.592,4.534 6.617,4.567 6.644,4.599 6.673,4.63 6.704,4.659 6.736,4.686 6.769,4.711 6.803,4.735 6.839,4.757 6.876,4.777 6.914,4.795 6.952,4.811 6.992,4.825 7.032,4.837 7.073,4.847 7.114,4.854 7.155,4.86 7.197,4.863 7.239,4.864 9.639,4.864
  Top Layer region: 9.639,0.724 7.239,0.724 7.197,0.725 7.155,0.728 7.114,0.734 7.073,0.741 7.032,0.751 6.992,0.763 6.952,0.777 6.914,0.793 6.876,0.811 6.839,0.831 6.803,0.853 6.769,0.877 6.736,0.902 6.704,0.929 6.673,0.958 6.644,0.989 6.617,1.021 6.592,1.054 6.568,1.088 6.546,1.124 6.526,1.161 6.508,1.199 6.492,1.237 6.478,1.277 6.466,1.317 6.456,1.358 6.449,1.399 6.443,1.44 6.44,1.482 6.439,1.524 6.44,1.566 6.443,1.608 6.449,1.649 6.456,1.69 6.466,1.731 6.478,1.771 6.492,1.811 6.508,1.849 6.526,1.887 6.546,1.924 6.568,1.96 6.592,1.994 6.617,2.027 6.644,2.059 6.673,2.09 6.704,2.119 6.736,2.146 6.769,2.171 6.803,2.195 6.839,2.217 6.876,2.237 6.914,2.255 6.952,2.271 6.992,2.285 7.032,2.297 7.073,2.307 7.114,2.314 7.155,2.32 7.197,2.323 7.239,2.324 9.639,2.324
  Top Layer region: 9.639,-9.436 7.239,-9.436 7.197,-9.435 7.155,-9.432 7.114,-9.426 7.073,-9.419 7.032,-9.409 6.992,-9.397 6.952,-9.383 6.914,-9.367 6.876,-9.349 6.839,-9.329 6.803,-9.307 6.769,-9.283 6.736,-9.258 6.704,-9.231 6.673,-9.202 6.644,-9.171 6.617,-9.139 6.592,-9.106 6.568,-9.072 6.546,-9.036 6.526,-8.999 6.508,-8.961 6.492,-8.923 6.478,-8.883 6.466,-8.843 6.456,-8.802 6.449,-8.761 6.443,-8.72 6.44,-8.678 6.439,-8.636 6.44,-8.594 6.443,-8.552 6.449,-8.511 6.456,-8.47 6.466,-8.429 6.478,-8.389 6.492,-8.349 6.508,-8.311 6.526,-8.273 6.546,-8.236 6.568,-8.2 6.592,-8.166 6.617,-8.133 6.644,-8.101 6.673,-8.07 6.704,-8.041 6.736,-8.014 6.769,-7.989 6.803,-7.965 6.839,-7.943 6.876,-7.923 6.914,-7.905 6.952,-7.889 6.992,-7.875 7.032,-7.863 7.073,-7.853 7.114,-7.846 7.155,-7.84 7.197,-7.837 7.239,-7.836 9.639,-7.836
  Top Layer region: 9.639,-11.976 7.239,-11.976 7.197,-11.975 7.155,-11.972 7.114,-11.966 7.073,-11.959 7.032,-11.949 6.992,-11.937 6.952,-11.923 6.914,-11.907 6.876,-11.889 6.839,-11.869 6.803,-11.847 6.769,-11.823 6.736,-11.798 6.704,-11.771 6.673,-11.742 6.644,-11.711 6.617,-11.679 6.592,-11.646 6.568,-11.612 6.546,-11.576 6.526,-11.539 6.508,-11.501 6.492,-11.463 6.478,-11.423 6.466,-11.383 6.456,-11.342 6.449,-11.301 6.443,-11.26 6.44,-11.218 6.439,-11.176 6.44,-11.134 6.443,-11.092 6.449,-11.051 6.456,-11.01 6.466,-10.969 6.478,-10.929 6.492,-10.889 6.508,-10.851 6.526,-10.813 6.546,-10.776 6.568,-10.74 6.592,-10.706 6.617,-10.673 6.644,-10.641 6.673,-10.61 6.704,-10.581 6.736,-10.554 6.769,-10.529 6.803,-10.505 6.839,-10.483 6.876,-10.463 6.914,-10.445 6.952,-10.429 6.992,-10.415 7.032,-10.403 7.073,-10.393 7.114,-10.386 7.155,-10.38 7.197,-10.377 7.239,-10.376 9.639,-10.376
  Top Layer region: 9.639,-14.516 7.239,-14.516 7.197,-14.515 7.155,-14.512 7.114,-14.506 7.073,-14.499 7.032,-14.489 6.992,-14.477 6.952,-14.463 6.914,-14.447 6.876,-14.429 6.839,-14.409 6.803,-14.387 6.769,-14.363 6.736,-14.338 6.704,-14.311 6.673,-14.282 6.644,-14.251 6.617,-14.219 6.592,-14.186 6.568,-14.152 6.546,-14.116 6.526,-14.079 6.508,-14.041 6.492,-14.003 6.478,-13.963 6.466,-13.923 6.456,-13.882 6.449,-13.841 6.443,-13.8 6.44,-13.758 6.439,-13.716 6.44,-13.674 6.443,-13.632 6.449,-13.591 6.456,-13.55 6.466,-13.509 6.478,-13.469 6.492,-13.429 6.508,-13.391 6.526,-13.353 6.546,-13.316 6.568,-13.28 6.592,-13.246 6.617,-13.213 6.644,-13.181 6.673,-13.15 6.704,-13.121 6.736,-13.094 6.769,-13.069 6.803,-13.045 6.839,-13.023 6.876,-13.003 6.914,-12.985 6.952,-12.969 6.992,-12.955 7.032,-12.943 7.073,-12.933 7.114,-12.926 7.155,-12.92 7.197,-12.917 7.239,-12.916 9.639,-12.916
  Top Layer region: 9.639,-17.056 7.239,-17.056 7.197,-17.055 7.155,-17.052 7.114,-17.046 7.073,-17.039 7.032,-17.029 6.992,-17.017 6.952,-17.003 6.914,-16.987 6.876,-16.969 6.839,-16.949 6.803,-16.927 6.769,-16.903 6.736,-16.878 6.704,-16.851 6.673,-16.822 6.644,-16.791 6.617,-16.759 6.592,-16.726 6.568,-16.692 6.546,-16.656 6.526,-16.619 6.508,-16.581 6.492,-16.543 6.478,-16.503 6.466,-16.463 6.456,-16.422 6.449,-16.381 6.443,-16.34 6.44,-16.298 6.439,-16.256 6.44,-16.214 6.443,-16.172 6.449,-16.131 6.456,-16.09 6.466,-16.049 6.478,-16.009 6.492,-15.969 6.508,-15.931 6.526,-15.893 6.546,-15.856 6.568,-15.82 6.592,-15.786 6.617,-15.753 6.644,-15.721 6.673,-15.69 6.704,-15.661 6.736,-15.634 6.769,-15.609 6.803,-15.585 6.839,-15.563 6.876,-15.543 6.914,-15.525 6.952,-15.509 6.992,-15.495 7.032,-15.483 7.073,-15.473 7.114,-15.466 7.155,-15.46 7.197,-15.457 7.239,-15.456 9.639,-15.456
  Top Layer region: 9.639,-22.136 7.239,-22.136 7.197,-22.135 7.155,-22.132 7.114,-22.126 7.073,-22.119 7.032,-22.109 6.992,-22.097 6.952,-22.083 6.914,-22.067 6.876,-22.049 6.839,-22.029 6.803,-22.007 6.769,-21.983 6.736,-21.958 6.704,-21.931 6.673,-21.902 6.644,-21.871 6.617,-21.839 6.592,-21.806 6.568,-21.772 6.546,-21.736 6.526,-21.699 6.508,-21.661 6.492,-21.623 6.478,-21.583 6.466,-21.543 6.456,-21.502 6.449,-21.461 6.443,-21.42 6.44,-21.378 6.439,-21.336 6.44,-21.294 6.443,-21.252 6.449,-21.211 6.456,-21.17 6.466,-21.129 6.478,-21.089 6.492,-21.049 6.508,-21.011 6.526,-20.973 6.546,-20.936 6.568,-20.9 6.592,-20.866 6.617,-20.833 6.644,-20.801 6.673,-20.77 6.704,-20.741 6.736,-20.714 6.769,-20.689 6.803,-20.665 6.839,-20.643 6.876,-20.623 6.914,-20.605 6.952,-20.589 6.992,-20.575 7.032,-20.563 7.073,-20.553 7.114,-20.546 7.155,-20.54 7.197,-20.537 7.239,-20.536 9.639,-20.536
  Top Layer region: 9.639,-24.676 7.239,-24.676 7.197,-24.675 7.155,-24.672 7.114,-24.666 7.073,-24.659 7.032,-24.649 6.992,-24.637 6.952,-24.623 6.914,-24.607 6.876,-24.589 6.839,-24.569 6.803,-24.547 6.769,-24.523 6.736,-24.498 6.704,-24.471 6.673,-24.442 6.644,-24.411 6.617,-24.379 6.592,-24.346 6.568,-24.312 6.546,-24.276 6.526,-24.239 6.508,-24.201 6.492,-24.163 6.478,-24.123 6.466,-24.083 6.456,-24.042 6.449,-24.001 6.443,-23.96 6.44,-23.918 6.439,-23.876 6.44,-23.834 6.443,-23.792 6.449,-23.751 6.456,-23.71 6.466,-23.669 6.478,-23.629 6.492,-23.589 6.508,-23.551 6.526,-23.513 6.546,-23.476 6.568,-23.44 6.592,-23.406 6.617,-23.373 6.644,-23.341 6.673,-23.31 6.704,-23.281 6.736,-23.254 6.769,-23.229 6.803,-23.205 6.839,-23.183 6.876,-23.163 6.914,-23.145 6.952,-23.129 6.992,-23.115 7.032,-23.103 7.073,-23.093 7.114,-23.086 7.155,-23.08 7.197,-23.077 7.239,-23.076 9.639,-23.076
  Top Layer region: 9.639,5.804 6.629,5.804 6.618,5.805 6.608,5.806 6.597,5.808 6.587,5.811 6.577,5.814 6.567,5.817 6.558,5.821 6.548,5.826 6.539,5.831 6.53,5.836 6.521,5.842 6.513,5.849 6.505,5.855 6.498,5.863 6.49,5.87 6.484,5.878 6.477,5.886 6.471,5.895 6.466,5.904 6.461,5.913 6.456,5.923 6.452,5.932 6.449,5.942 6.446,5.952 6.443,5.962 6.441,5.973 6.44,5.983 6.439,5.994 6.439,6.004 6.439,7.204 6.439,7.214 6.44,7.225 6.441,7.235 6.443,7.246 6.446,7.256 6.449,7.266 6.452,7.276 6.456,7.285 6.461,7.295 6.466,7.304 6.471,7.313 6.477,7.322 6.484,7.33 6.49,7.338 6.498,7.345 6.505,7.353 6.513,7.359 6.521,7.366 6.53,7.372 6.539,7.377 6.548,7.382 6.558,7.387 6.567,7.391 6.577,7.394 6.587,7.397 6.597,7.4 6.608,7.402 6.618,7.403 6.629,7.404 9.639,7.404
  Top Layer region: 9.639,-19.596 6.629,-19.596 6.618,-19.595 6.608,-19.594 6.597,-19.592 6.587,-19.589 6.577,-19.586 6.567,-19.583 6.558,-19.579 6.548,-19.574 6.539,-19.569 6.53,-19.564 6.521,-19.558 6.513,-19.551 6.505,-19.545 6.498,-19.537 6.49,-19.53 6.484,-19.522 6.477,-19.514 6.471,-19.505 6.466,-19.496 6.461,-19.487 6.456,-19.477 6.452,-19.468 6.449,-19.458 6.446,-19.448 6.443,-19.438 6.441,-19.427 6.44,-19.417 6.439,-19.406 6.439,-19.396 6.439,-18.196 6.439,-18.186 6.44,-18.175 6.441,-18.165 6.443,-18.154 6.446,-18.144 6.449,-18.134 6.452,-18.124 6.456,-18.115 6.461,-18.105 6.466,-18.096 6.471,-18.087 6.477,-18.078 6.484,-18.07 6.49,-18.062 6.498,-18.055 6.505,-18.047 6.513,-18.041 6.521,-18.034 6.53,-18.028 6.539,-18.023 6.548,-18.018 6.558,-18.013 6.567,-18.009 6.577,-18.006 6.587,-18.003 6.597,-18 6.608,-17.998 6.618,-17.997 6.629,-17.996 9.639,-17.996
  Top Layer region: -4.149,-22.847 -4.107,-22.85 -4.066,-22.856 -4.025,-22.863 -3.984,-22.873 -3.944,-22.885 -3.904,-22.899 -3.866,-22.915 -3.828,-22.933 -3.791,-22.953 -3.755,-22.975 -3.721,-22.999 -3.688,-23.024 -3.656,-23.051 -3.625,-23.08 -3.596,-23.111 -3.569,-23.143 -3.544,-23.176 -3.52,-23.21 -3.498,-23.246 -3.478,-23.283 -3.46,-23.321 -3.444,-23.359 -3.43,-23.399 -3.418,-23.439 -3.408,-23.48 -3.401,-23.521 -3.395,-23.562 -3.392,-23.604 -3.391,-23.646 -3.391,-26.046 -4.991,-26.046 -4.991,-23.646 -4.99,-23.604 -4.987,-23.562 -4.981,-23.521 -4.974,-23.48 -4.964,-23.439 -4.952,-23.399 -4.938,-23.359 -4.922,-23.321 -4.904,-23.283 -4.884,-23.246 -4.862,-23.21 -4.838,-23.176 -4.813,-23.143 -4.786,-23.111 -4.757,-23.08 -4.726,-23.051 -4.694,-23.024 -4.661,-22.999 -4.627,-22.975 -4.591,-22.953 -4.554,-22.933 -4.516,-22.915 -4.478,-22.899 -4.438,-22.885 -4.398,-22.873 -4.357,-22.863 -4.316,-22.856 -4.275,-22.85 -4.233,-22.847 -4.191,-22.846
  Top Layer region: -1.03,-22.847 -1.02,-22.848 -1.009,-22.85 -0.999,-22.853 -0.989,-22.856 -0.979,-22.859 -0.97,-22.863 -0.96,-22.868 -0.951,-22.873 -0.942,-22.878 -0.933,-22.884 -0.925,-22.891 -0.917,-22.897 -0.91,-22.905 -0.902,-22.912 -0.896,-22.92 -0.889,-22.928 -0.883,-22.937 -0.878,-22.946 -0.873,-22.955 -0.868,-22.965 -0.864,-22.974 -0.861,-22.984 -0.858,-22.994 -0.855,-23.004 -0.853,-23.015 -0.852,-23.025 -0.851,-23.036 -0.851,-23.046 -0.851,-26.046 -2.451,-26.046 -2.451,-23.046 -2.451,-23.036 -2.45,-23.025 -2.449,-23.015 -2.447,-23.004 -2.444,-22.994 -2.441,-22.984 -2.438,-22.974 -2.434,-22.965 -2.429,-22.955 -2.424,-22.946 -2.419,-22.937 -2.413,-22.928 -2.406,-22.92 -2.4,-22.912 -2.392,-22.905 -2.385,-22.897 -2.377,-22.891 -2.369,-22.884 -2.36,-22.878 -2.351,-22.873 -2.342,-22.868 -2.332,-22.863 -2.323,-22.859 -2.313,-22.856 -2.303,-22.853 -2.293,-22.85 -2.282,-22.848 -2.272,-22.847 -2.261,-22.846 -1.041,-22.846
  Top Layer region: 0.931,-22.847 0.973,-22.85 1.014,-22.856 1.055,-22.863 1.096,-22.873 1.136,-22.885 1.176,-22.899 1.214,-22.915 1.252,-22.933 1.289,-22.953 1.325,-22.975 1.359,-22.999 1.392,-23.024 1.424,-23.051 1.455,-23.08 1.484,-23.111 1.511,-23.143 1.536,-23.176 1.56,-23.21 1.582,-23.246 1.602,-23.283 1.62,-23.321 1.636,-23.359 1.65,-23.399 1.662,-23.439 1.672,-23.48 1.679,-23.521 1.685,-23.562 1.688,-23.604 1.689,-23.646 1.689,-26.046 0.089,-26.046 0.089,-23.646 0.09,-23.604 0.093,-23.562 0.099,-23.521 0.106,-23.48 0.116,-23.439 0.128,-23.399 0.142,-23.359 0.158,-23.321 0.176,-23.283 0.196,-23.246 0.218,-23.21 0.242,-23.176 0.267,-23.143 0.294,-23.111 0.323,-23.08 0.354,-23.051 0.386,-23.024 0.419,-22.999 0.453,-22.975 0.489,-22.953 0.526,-22.933 0.564,-22.915 0.602,-22.899 0.642,-22.885 0.682,-22.873 0.723,-22.863 0.764,-22.856 0.805,-22.85 0.847,-22.847 0.889,-22.846
  Top Layer region: -10.499,25.183 -10.457,25.18 -10.416,25.174 -10.375,25.167 -10.334,25.157 -10.294,25.145 -10.254,25.131 -10.216,25.115 -10.178,25.097 -10.141,25.077 -10.105,25.055 -10.071,25.031 -10.038,25.006 -10.006,24.979 -9.975,24.95 -9.946,24.919 -9.919,24.887 -9.894,24.854 -9.87,24.82 -9.848,24.784 -9.828,24.747 -9.81,24.709 -9.794,24.671 -9.78,24.631 -9.768,24.591 -9.758,24.55 -9.751,24.509 -9.745,24.468 -9.742,24.426 -9.741,24.384 -9.742,24.342 -9.745,24.3 -9.751,24.259 -9.758,24.218 -9.768,24.177 -9.78,24.137 -9.794,24.097 -9.81,24.059 -9.828,24.021 -9.848,23.984 -9.87,23.948 -9.894,23.914 -9.919,23.881 -9.946,23.849 -9.975,23.818 -10.006,23.789 -10.038,23.762 -10.071,23.737 -10.105,23.713 -10.141,23.691 -10.178,23.671 -10.216,23.653 -10.254,23.637 -10.294,23.623 -10.334,23.611 -10.375,23.601 -10.416,23.594 -10.457,23.588 -10.499,23.585 -10.541,23.584 -12.941,23.584 -12.941,25.184 -10.541,25.184
  silkscreen extent -13.94,-25.25 8.85,27.05, body extent -12.15,-25.25 8.85,27.05, height 3.73
"SMD Resistor-Footprint-1" [mm]
  rect 0.97x1.38 smd: 1(-0.895,-0.021) 2(0.965,-0.021)
  silkscreen extent -0.08,-0.7 0.16,0.66, body extent -0.95,-0.65 1.05,0.6, height 0.6

## Part data
J1: library part CMP-00043-1, "3 Pin Breakout Header"
J2: library part CMP-00041-1, "2Pin  Breakout Header"
M1: library part CMP-00035-2
R1 R2 R3 R4 R5 R6: library part CMP-00019-2, "Generic SMD Resistor"
S1 S2 S3: library part CMP-00006-1, "6 Pin with LED"
T1: library part CMP-00027-3, "UART Telemetry Antenna"
U1: library part CMP-00024-2, "1Cell LiPo Battery Module"

## Via types
v1: diameter 1.27, hole 0.711, Top Layer to Bottom Layer, 5 vias
v2: diameter 2.5, hole 2.2, Top Layer to Bottom Layer, 3 vias

## Nets (pads, with @x,y where several pads share a name; then routed paths per layer and width w, separated by ;. In a path a pad name is that pad's centre, name@x,y a point inside that pad or via, vN(x,y) a via of type N, cw(c..) or ccw(c..) an arc to the next point about the centre after c; other vN are vias at no path point)
+5: J1.1 M1.40 S1.2 S2.2 S3.2 T1.VCC T1.VCC_ U1.Vout+ | length 100.1
  Top Layer w0.254: M1.40 52.197,124.206 54.483,121.92 54.483,101.98 53.594,101.091 J1.1 ; S1.2 67.533,76.759 67.533,83.47 66.215,84.788 S2.2 67.406,86.157 67.406,92.792 S3.2 67.406,95.174 67.406,100.402 67.141,100.668 U1.Vout+
  Bottom Layer w0.254: T1.VCC T1.VCC_ 34.891,99.915 34.891,100.804 35.56,101.473 46.863,101.473 49.022,99.314 J1.1 53.594,101.091 54.483,101.98 54.483,103.284 56.228,105.029 64.982,105.029 U1.Vout+
GND: "U1.Vout -" J1.3 M1.38 R2.2 R4.2 R6.2 S1.K S2.K S3.K T1.GND T1.GND_ | length 21.2
  Top Layer w0.254: M1.38 52.324,119.126 53.221,118.229 53.221,102.877
  Bottom Layer w0.254: T1.GND T1.GND_
  other v2: 54.864,74.549
NetJ1_2: J1.2 T1.SET T1.SET_ | length 10.9
  Bottom Layer w0.254: T1.SET_ T1.SET 52.324,98.044 J1.2
NetJ2_1: "U1.Bat +" J2.1 | length 22.5
  Top Layer w0.254: J2.1 53.467,89.583 53.625,89.741 53.96,89.741 55.626,91.406 55.626,99.441 59.055,102.87 64.601,102.87
NetJ2_2: "U1.Bat -" J2.2 | length 13.3
  Top Layer w0.254: J2.2 54.991,92.456 54.991,102.107 55.761,102.877
  Bottom Layer w0.254: 55.5,102.616 55.761,102.877
NetM1_1: M1.1 T1.RXD T1.RXD_ | length 35.9
  Top Layer w0.254: M1.1 34.036,124.206 34.925,123.317 34.925,120.269 36.195,118.999 39.116,118.999 39.878,118.237 T1.RXD
  Bottom Layer w0.254: T1.RXD T1.RXD_
NetM1_2: M1.2 T1.TXD T1.TXD_ | length 40.8
  Top Layer w0.254: M1.2 32.893,121.666 34.163,120.396 34.163,108.013 33.147,106.997 33.147,97.409 35.052,95.504 39.878,95.504 T1.TXD
  Bottom Layer w0.254: T1.TXD T1.TXD_
NetM1_17: M1.17 R1.1 | length 36.2
  Top Layer w0.254: M1.17 30.315,83.439 v1(37.338,83.439)
  Bottom Layer w0.254: v1(37.338,83.439) 41.32,79.457 61.546,79.457 62.877,78.126 R1.1
NetM1_19: M1.19 R2.1 S1.4 | length 31.9
  Top Layer w0.254: M1.19 30.326,78.348 v1(36.383,78.348)
  Bottom Layer w0.254: v1(36.383,78.348) 36.732,77.999 R2.1 59.484,77.945 S1.4
NetM1_20: M1.20 R3.1 | length 44.1
  Top Layer w0.254: M1.20 32.004,75.946 35.052,72.898 49.784,72.898 52.092,75.206 52.175,75.206 55.753,78.784 55.753,82.591 v1(55.808,82.645)
  Bottom Layer w0.254: v1(55.808,82.645) 55.808,83.621 58.547,86.36 63.044,86.36 64.002,87.319 R3.1
NetM1_21: M1.21 R4.1 S2.3 | length 20.8
  Top Layer w0.254: M1.21 52.197,75.946 53.975,77.724 53.975,83.973 v1(56.308,86.306)
  Bottom Layer w0.254: v1(56.308,86.306) 57.653,87.651 R4.1 59.357,87.724 S2.3
NetM1_22: M1.22 R5.1 | length 27.4
  Top Layer w0.254: M1.22 51.816,78.486 52.578,79.248 v1(52.578,82.423)
  Bottom Layer w0.254: v1(52.578,82.423) 52.578,84.455 56.769,88.646 56.769,91.313 57.658,92.202 60.325,92.202 61.087,92.964 61.087,94.234 63.373,96.52 R5.1
NetM1_24: M1.24 R6.1 S3.3 | length 23.7
  Top Layer w0.254: M1.24 50.8,83.566 56.388,89.154 56.388,97.663 57.788,99.063 S3.3
  Bottom Layer w0.254: R6.1 59.357,96.595 S3.3
NetR1_2: R1.2 S1.A | length 4.5
  Bottom Layer w0.254: S1.A 64.059,79.502 65.278,79.502 65.732,79.048 65.732,78.383 R1.2
NetR3_2: R3.2 S2.A | length 4.7
  Bottom Layer w0.254: S2.A 63.678,89.154 65.151,89.154 65.659,88.646 65.659,87.727 R3.2
NetR5_2: R5.2 S3.A | length 4.7
  Bottom Layer w0.254: S3.A 62.885,98.964 64.358,98.964 65.88,97.442 65.88,96.635 R5.2
pads on no net: "U1.GND In" M1.3 M1.4 M1.5 M1.6 M1.7 M1.8 M1.9 M1.10 M1.11 M1.12 M1.13 M1.14 M1.15 M1.16 M1.18 M1.23 M1.25 M1.26 M1.27 M1.28 M1.29 M1.30 M1.31 M1.32 M1.33 M1.34 M1.35 M1.36 M1.37 M1.39 M1.A M1.B M1.C M1.D M1.D1 M1.D2 M1.D3 M1.TP1 M1.TP2 M1.TP3 M1.TP4 M1.TP5 M1.TP6 S1.1 S1.3 S2.1 S2.4 S3.1 S3.4 U1.Vin
copper on no net:
  other v2: 70.104,100.838 26.924,124.206

## Polygon pours and split planes (outlines as drawn)
GND on Bottom Layer "NONET_L-01_P-001" (solid, pour order 0): 30.607,107.187 30.607,74.295 67.31,74.295 67.31,106.933

## Silkscreen, mask and mechanical layers (free items; w line width, h text height)
Bottom Overlay:
  text "Remote Home Controller" at 65.659,118.364 h1.52
  text "V 1.0" at 65.913,115.57 h1.52